# Altium PCB ProtoStack_H750VBT.PcbDoc
Units mm, origin at the board's own origin, x right, y up, seen from the top; angles counter-clockwise.
Board outline 32.13 x 113.14 mm, 5 copper layers (Top Layer, Mid-Layer 1, TopLayer, Internal Plane 1, MidLayer2, Mid-Layer 2, BottomLayer, Bottom Layer), stack 0.498 mm thick; 3 components, 82 nets, 186 pads, 36 vias.
Unrouted connection lines stored in the file: 101.
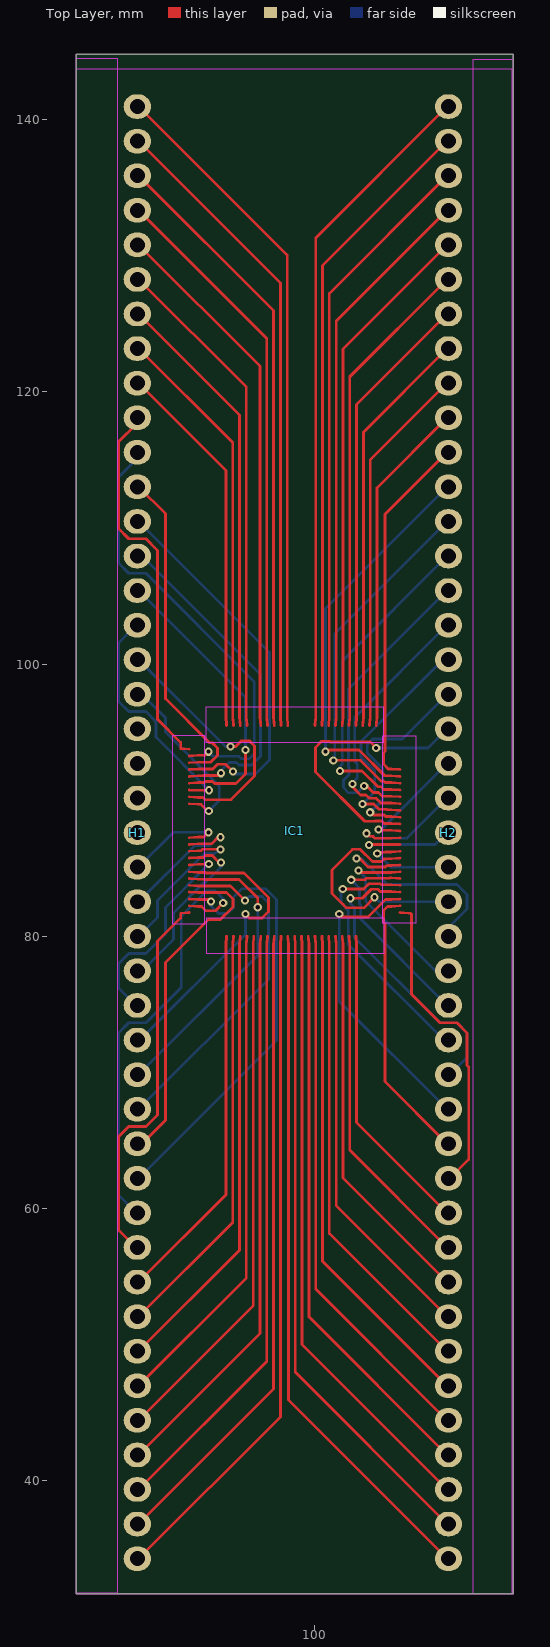
[diagram p0: Top Layer view]
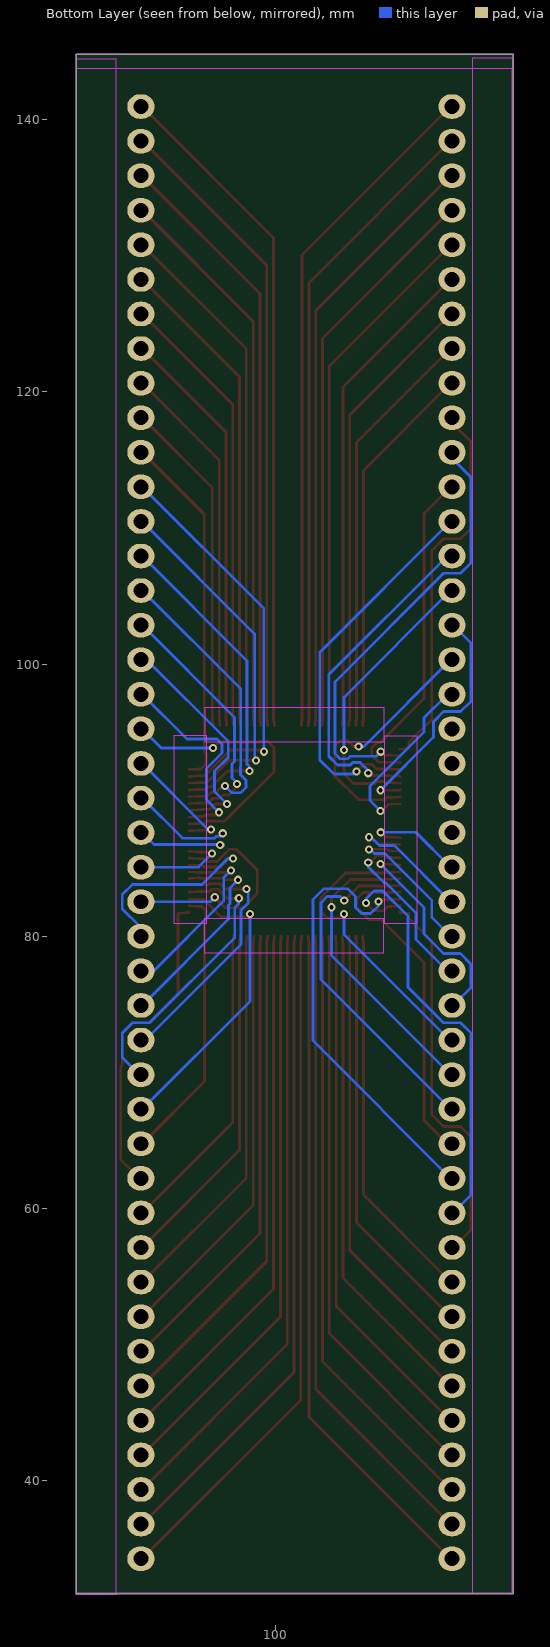
[diagram p1: Bottom Layer view, seen from below]
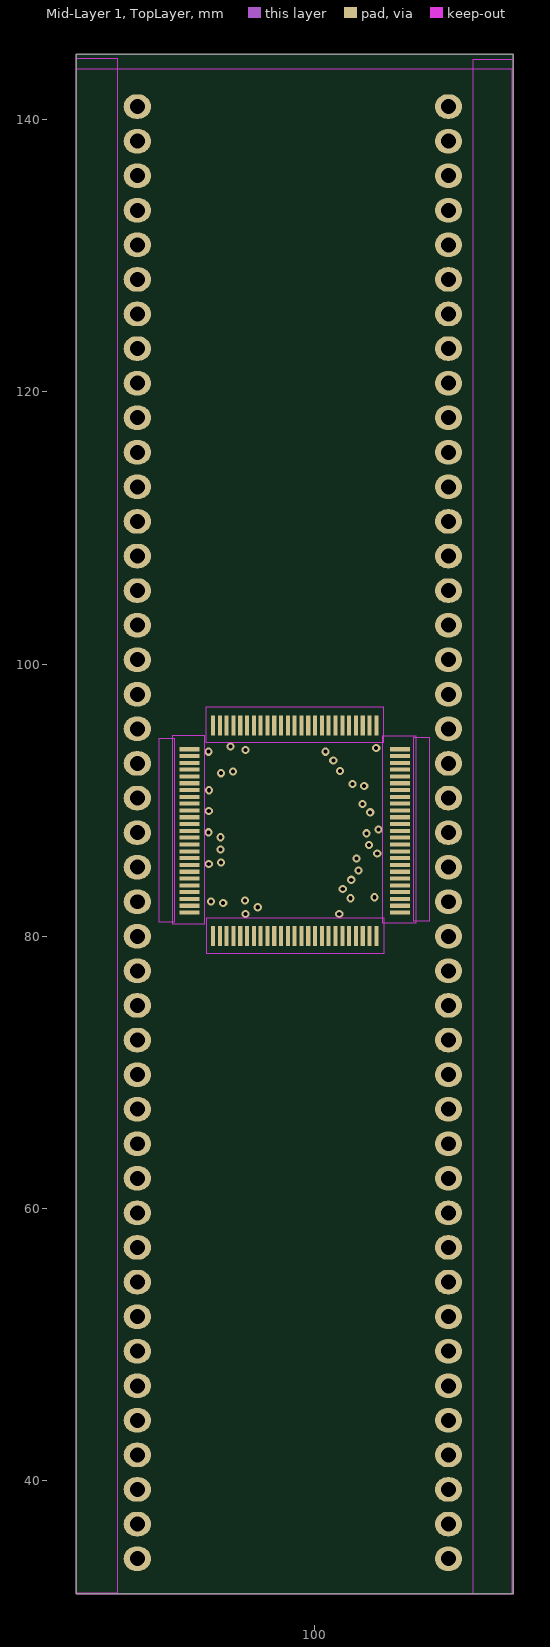
[diagram p2: Mid-Layer 1, TopLayer]
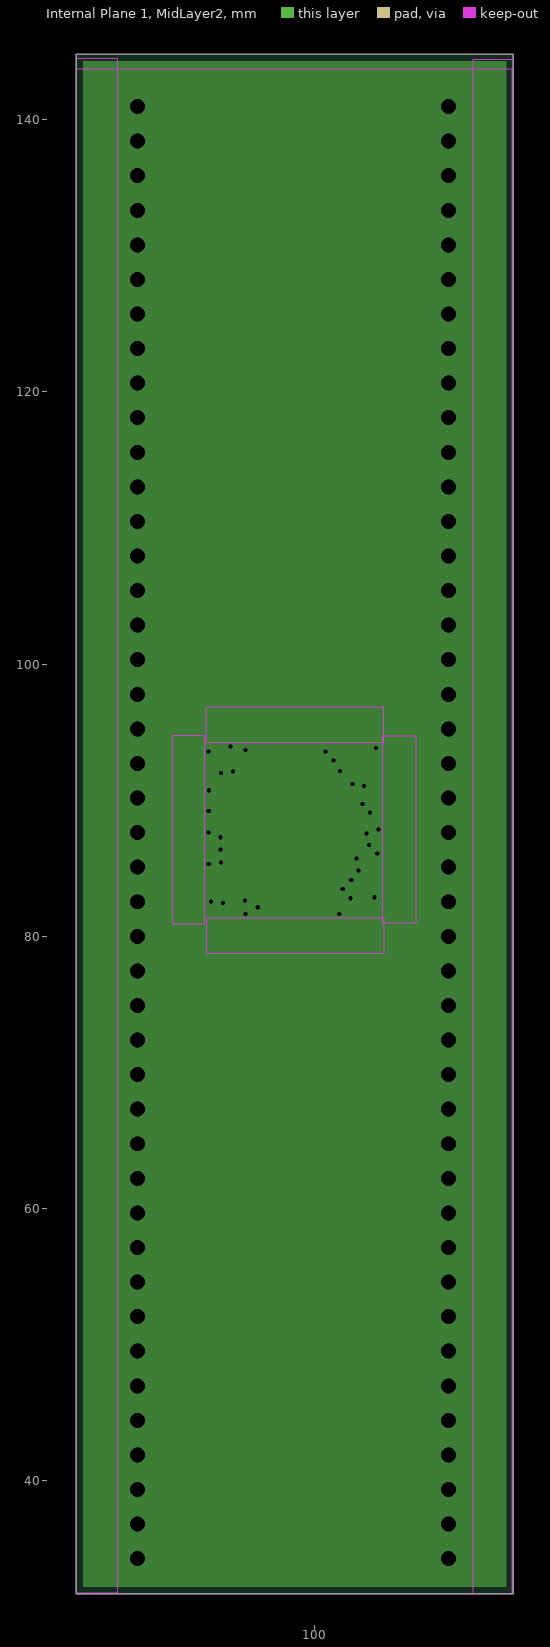
[diagram p3: Internal Plane 1, MidLayer2, clearances drawn from the general rule]

## Layer stack, top to bottom
Top Solder: solder mask 0.0102, Solder Resist, Dk 3.5
Top Layer: signal copper 0.0356
Dielectric 1: dielectric 0.32, FR-4, Dk 4.8
Mid-Layer 1, TopLayer: signal copper 0.0356
Internal Plane 1, MidLayer2: plane copper 0.0356, net Internal Plane 1
Mid-Layer 2, BottomLayer: signal copper 0.0356
Bottom Layer: signal copper 0.0356
Bottom Solder: solder mask 0.0102, Solder Resist, Dk 3.5

## Board outline
82.493,31.693 114.62,31.693 114.62,144.83 82.493,144.83

## Design rules (kind name [scope] priority, off if disabled: settings)
Clearance [All] p1: gap=0.254 ignorepadtopadclearanceinfootprint=FALSE except(0: Arc-Hole Track-Hole SMDPad-Hole THPad-Hole Via-Hole Fill-Hole Poly-Hole Region-Hole Text-Hole)
ComponentClearance ComponentClearance_Design [All] p1: gap=0.25 collisioncheckmode=3 verticalgap=0.25 showdistances=FALSE
ComponentClearance [All] p2: gap=0.254 collisioncheckmode=3 verticalgap=0.254 showdistances=FALSE
PlaneClearance [All] p1: clearance=0
PlaneConnect PadTherm_Pad1 [InPadClass('Pad1')] p1: planeconnectstyle=NoConnect reliefexpansion=0.508 reliefentries=4 reliefconductorwidth=0.254 reliefairgap=0.254
PlaneConnect PadTherm_Pad2 [InPadClass('Pad2')] p2: planeconnectstyle=NoConnect reliefexpansion=0.508 reliefentries=4 reliefconductorwidth=0.254 reliefairgap=0.254
PlaneConnect PadTherm_Pad3 [InPadClass('Pad3')] p3: planeconnectstyle=NoConnect reliefexpansion=0.508 reliefentries=4 reliefconductorwidth=0.254 reliefairgap=0.254
PlaneConnect [All] p4: planeconnectstyle=Relief reliefexpansion=0.508 reliefentries=4 reliefconductorwidth=0.254 reliefairgap=0.254
PolygonConnect [All] p1: connectstyle=Relief reliefconductorwidth=0.254 reliefentries=4 polygonreliefangle="90 Angle" airgapwidth=0.254
RoutingVias [All] p1: holewidth=0.711 width=1.27 viastyle="Through Hole" minholewidth=0.711 minwidth=1.27 maxholewidth=0.711 maxwidth=1.27
SolderMaskExpansion [All] p1: expansion=0.102 istentingtop=FALSE
Width [All] p1: maxlimit=0.254 minlimit=0.254 preferedwidth=0.254
27 further rules are at their usual default settings.

## Classes and differential pairs
pad class Pad3: H1-1 H1-2 H1-3 H1-4 H1-5 H1-6 H1-7 H1-8 H1-9 H1-10 H1-11 H1-12 H1-13 H1-14 H1-15 H1-16 H1-17 H1-18 H1-19 H1-20 H1-21 H1-22 H1-23 H1-24 H1-25 H1-26 H1-27 H1-28 H1-29 H1-30 H1-31 H1-32 H1-33 H1-34 H1-35 H1-36 H1-37 H1-38 H1-39 H1-40 H1-41 H1-42 H1-43 H2-1 H2-2 H2-3 H2-4 H2-5 H2-6 H2-7 H2-8 H2-9 H2-10 H2-11 H2-12 H2-13 H2-14 H2-15 H2-16 H2-17 H2-18 H2-19 H2-20 H2-21 H2-22 H2-23 H2-24 H2-25 H2-26 H2-27 H2-28 H2-29 H2-30 H2-31 H2-32 H2-33 H2-34 H2-35 H2-36 H2-37 H2-38 H2-39 H2-40 H2-41 H2-42 H2-43
pad class Pad2: IC1-26 IC1-27 IC1-28 IC1-29 IC1-30 IC1-31 IC1-32 IC1-33 IC1-34 IC1-35 IC1-36 IC1-37 IC1-38 IC1-39 IC1-40 IC1-41 IC1-42 IC1-43 IC1-44 IC1-45 IC1-46 IC1-47 IC1-48 IC1-49 IC1-50 IC1-76 IC1-77 IC1-78 IC1-79 IC1-80 IC1-81 IC1-82 IC1-83 IC1-84 IC1-85 IC1-86 IC1-87 IC1-88 IC1-89 IC1-90 IC1-91 IC1-92 IC1-93 IC1-94 IC1-95 IC1-96 IC1-97 IC1-98 IC1-99 IC1-100
pad class Pad1: IC1-1 IC1-2 IC1-3 IC1-4 IC1-5 IC1-6 IC1-7 IC1-8 IC1-9 IC1-10 IC1-11 IC1-12 IC1-13 IC1-14 IC1-15 IC1-16 IC1-17 IC1-18 IC1-19 IC1-20 IC1-21 IC1-22 IC1-23 IC1-24 IC1-25 IC1-51 IC1-52 IC1-53 IC1-54 IC1-55 IC1-56 IC1-57 IC1-58 IC1-59 IC1-60 IC1-61 IC1-62 IC1-63 IC1-64 IC1-65 IC1-66 IC1-67 IC1-68 IC1-69 IC1-70 IC1-71 IC1-72 IC1-73 IC1-74 IC1-75

## Components (designator, comment, footprint, x,y, rotation, side; value= is the part's Value field where it differs from the comment)
H1 "" HeaderDtack_43_H1_H1(Primary) 86.995,140.97 r0 top
H2 "" HeaderDtack_43_H2_H2(Primary) 109.855,140.97 r0 top
IC1 "" QFP50P1600X1600X160-100N_ 98.556,87.756 r0 top

## Footprints (in the part's own frame and the unit in brackets; to place one, negate y for a bottom-side part, rotate by r counter-clockwise, add the part's x,y. Pads: shape width x height; smd on the part's side, far side on the other; paste and mask are expansions set on the pad)
HeaderDtack_43_H1_H1(Primary) [mm]
  oval 2x1.8 hole 1.1: 1(0,0) 2(0,-2.54) 3(0,-5.08) 4(0,-7.62) 5(0,-10.16) 6(0,-12.7) 7(0,-15.24) 8(0,-17.78) 9(0,-20.32) 10(0,-22.86) 11(0,-25.4) 12(0,-27.94) 13(0,-30.48) 14(0,-33.02) 15(0,-35.56) 16(0,-38.1) 17(0,-40.64) 18(0,-43.18) 19(0,-45.72) 20(0,-48.26) 21(0,-50.8) 22(0,-53.34) 23(0,-55.88) 24(0,-58.42) 25(0,-60.96) 26(0,-63.5) 27(0,-66.04) 28(0,-68.58) 29(0,-71.12) 30(0,-73.66) 31(0,-76.2) 32(0,-78.74) 33(0,-81.28) 34(0,-83.82) 35(0,-86.36) 36(0,-88.9) 37(0,-91.44) 38(0,-93.98) 39(0,-96.52) 40(0,-99.06) 41(0,-101.6) 42(0,-104.14) 43(0,-106.68)
HeaderDtack_43_H2_H2(Primary) [mm]
  oval 2x1.8 hole 1.1: 1(0,0) 2(0,-2.54) 3(0,-5.08) 4(0,-7.62) 5(0,-10.16) 6(0,-12.7) 7(0,-15.24) 8(0,-17.78) 9(0,-20.32) 10(0,-22.86) 11(0,-25.4) 12(0,-27.94) 13(0,-30.48) 14(0,-33.02) 15(0,-35.56) 16(0,-38.1) 17(0,-40.64) 18(0,-43.18) 19(0,-45.72) 20(0,-48.26) 21(0,-50.8) 22(0,-53.34) 23(0,-55.88) 24(0,-58.42) 25(0,-60.96) 26(0,-63.5) 27(0,-66.04) 28(0,-68.58) 29(0,-71.12) 30(0,-73.66) 31(0,-76.2) 32(0,-78.74) 33(0,-81.28) 34(0,-83.82) 35(0,-86.36) 36(0,-88.9) 37(0,-91.44) 38(0,-93.98) 39(0,-96.52) 40(0,-99.06) 41(0,-101.6) 42(0,-104.14) 43(0,-106.68)
QFP50P1600X1600X160-100N_ [mm]
  round 0 / inner rect 1.475x0.3 / far side round 0 all layers, no hole: 1(-7.738,6) 2(-7.738,5.5) 3(-7.738,5) 4(-7.738,4.5) 5(-7.738,4) 6(-7.738,3.5) 7(-7.738,3) 8(-7.738,2.5) 9(-7.738,2) 10(-7.738,1.5) 11(-7.738,1) 12(-7.738,0.5) 13(-7.738,0) 14(-7.738,-0.5) 15(-7.738,-1) 16(-7.738,-1.5) 17(-7.738,-2) 18(-7.738,-2.5) 19(-7.738,-3) 20(-7.738,-3.5) 21(-7.738,-4) 22(-7.738,-4.5) 23(-7.738,-5) 24(-7.738,-5.5) 25(-7.738,-6) 51(7.738,-6) 52(7.738,-5.5) 53(7.738,-5) 54(7.738,-4.5) 55(7.738,-4) 56(7.738,-3.5) 57(7.738,-3) 58(7.738,-2.5) 59(7.738,-2) 60(7.738,-1.5) 61(7.738,-1) 62(7.738,-0.5) 63(7.738,0) 64(7.738,0.5) 65(7.738,1) 66(7.738,1.5) 67(7.738,2) 68(7.738,2.5) 69(7.738,3) 70(7.738,3.5) 71(7.738,4) 72(7.738,4.5) 73(7.738,5) 74(7.738,5.5) 75(7.738,6)
  round 0 / inner rect 0.3x1.475 / far side round 0 all layers, no hole: 26(-6,-7.738) 27(-5.5,-7.738) 28(-5,-7.738) 29(-4.5,-7.738) 30(-4,-7.738) 31(-3.5,-7.738) 32(-3,-7.738) 33(-2.5,-7.738) 34(-2,-7.738) 35(-1.5,-7.738) 36(-1,-7.738) 37(-0.5,-7.738) 38(0,-7.738) 39(0.5,-7.738) 40(1,-7.738) 41(1.5,-7.738) 42(2,-7.738) 43(2.5,-7.738) 44(3,-7.738) 45(3.5,-7.738) 46(4,-7.738) 47(4.5,-7.738) 48(5,-7.738) 49(5.5,-7.738) 50(6,-7.738) 76(6,7.738) 77(5.5,7.738) 78(5,7.738) 79(4.5,7.738) 80(4,7.738) 81(3.5,7.738) 82(3,7.738) 83(2.5,7.738) 84(2,7.738) 85(1.5,7.738) 86(1,7.738) 87(0.5,7.738) 88(0,7.738) 89(-0.5,7.738) 90(-1,7.738) 91(-1.5,7.738) 92(-2,7.738) 93(-2.5,7.738) 94(-3,7.738) 95(-3.5,7.738) 96(-4,7.738) 97(-4.5,7.738) 98(-5,7.738) 99(-5.5,7.738) 100(-6,7.738)

## Via types
v1: diameter 0.6, hole 0.3, Top Layer to Bottom Layer, 36 vias

## Nets (pads, with @x,y where several pads share a name; then routed paths per layer and width w, separated by ;. In a path a pad name is that pad's centre, name@x,y a point inside that pad or via, vN(x,y) a via of type N, cw(c..) or ccw(c..) an arc to the next point about the centre after c; other vN are vias at no path point)
NetH1_1: H1.1 IC1.89 | length 50.1
  Top Layer w0.203: H1.1 87.095,140.97 98.008,130.057 98.008,96.232 98.008,96.13 IC1.89
NetH1_2: H1.2 IC1.90 | length 47.4
  Top Layer w0.203: H1.2 87.095,138.43 97.508,128.017 97.508,96.232 97.508,96.13 IC1.90
NetH1_3: H1.3 IC1.91 | length 44.6
  Top Layer w0.203: H1.3 87.095,135.89 97.008,125.977 97.008,96.232 97.008,96.13 IC1.91
NetH1_4: H1.4 IC1.92 | length 41.9
  Top Layer w0.203: H1.4 87.095,133.35 96.508,123.937 96.508,96.232 96.508,96.13 IC1.92
NetH1_5: H1.5 IC1.93 | length 39.1
  Top Layer w0.203: H1.5 87.095,130.81 96.008,121.897 96.008,96.232 96.008,96.13 IC1.93
NetH1_6: H1.6 IC1.95 | length 36.2
  Top Layer w0.203: H1.6 87.095,128.27 95.008,120.357 95.008,96.232 95.008,96.13 IC1.95
NetH1_7: H1.7 IC1.96 | length 33.4
  Top Layer w0.203: H1.7 87.095,125.73 94.508,118.317 94.508,96.232 94.508,96.13 IC1.96
NetH1_8: H1.8 IC1.97 | length 30.7
  Top Layer w0.203: H1.8 87.095,123.19 94.008,116.277 94.008,96.232 94.008,96.13 IC1.97
NetH1_9: H1.9 IC1.98 | length 27.9
  Top Layer w0.203: H1.9 87.095,120.65 93.508,114.237 93.508,96.232 93.508,96.13 IC1.98
NetH1_10: H1.10 IC1.1 | length 28.2
  Top Layer w0.203: 85.613,111.803 85.613,113.739 ; 85.613,114.343 85.613,116.343 86.895,117.625 86.895,118.11 H1.10 ; 85.613,111.802 85.613,109.976 86.369,109.22 87.621,109.22 88.478,108.363 88.478,95.957 90.182,94.253 90.182,93.906 90.182,93.805 IC1.1 ; 85.613,113.74 85.613,114.342
NetH1_11: H1.11 IC1.2 | length 32.9
  Top Layer w0.203: IC1.2 91.454,93.305 91.556,93.305 91.963,93.305 v1(92.234,93.575)
  Bottom Layer w0.203: 85.613,109.939 85.613,111.136 ; 85.613,111.803 85.613,113.739 86.895,115.021 86.895,115.57 H1.11 ; 85.613,109.938 85.613,107.436 86.369,106.68 87.621,106.68 95.594,98.707 95.594,93.433 95.209,93.048 94.664,93.048 94.477,93.235 92.574,93.235 v1(92.234,93.575) ; 85.613,111.136 85.613,111.802
NetH1_12: H1.12 IC1.3 | length 24.6
  Top Layer w0.203: H1.12 87.095,113.03 89.062,111.063 89.062,97.468 92.298,94.231 92.505,94.231 92.889,93.847 92.889,93.304 92.39,92.805 91.556,92.805 91.454,92.805 IC1.3
NetH1_13: H1.13 IC1.4 | length 28.4
  Top Layer w0.203: IC1.4 91.454,92.305 91.556,92.305 92.537,92.305 92.881,92.649 93.484,92.649 v1(94.015,92.118)
  Bottom Layer w0.203: H1.13 87.095,110.49 96.711,100.874 96.711,92.97 95.672,91.931 94.202,91.931 v1(94.015,92.118)
NetH1_14: H1.14 IC1.5 | length 24.8
  Top Layer w0.203: IC1.5 91.454,91.805 91.556,91.805 91.801,91.805 91.816,91.82 92.979,91.82 v1(93.153,91.993)
  Bottom Layer w0.203: H1.14 87.095,107.95 87.337,107.95 96.053,99.233 96.053,93.243 95.399,92.589 94.474,92.589 94.287,92.776 93.743,92.776 93.153,92.186 v1(93.153,91.993)
NetH1_15: H1.15 IC1.6 | length 21.3
  Top Layer w0.203: IC1.6 91.454,91.305 91.556,91.305 91.926,91.305 91.999,91.377 92.524,91.377 92.665,91.236 94.239,91.236 94.937,91.933 v1(94.937,93.705)
  Bottom Layer w0.203: H1.15 87.095,105.41 94.937,97.568 v1(94.937,93.705)
NetH1_16: H1.16 IC1.7 | length 17.7
  Top Layer w0.203: IC1.7 91.454,90.743 91.556,90.743 v1(92.262,90.743)
  Bottom Layer w0.203: 85.613,99.525 85.613,101.557 86.895,102.84 86.895,102.87 H1.16 ; 85.613,99.524 85.613,97.276 86.369,96.52 87.621,96.52 88.365,95.776 88.365,94.639 v1(92.262,90.743)
NetH1_17: H1.17 IC1.8 | length 19.4
  Top Layer w0.203: IC1.8 91.454,90.208 91.556,90.208 91.805,90.208 91.966,90.047 93.877,90.047 95.613,91.783 95.613,93.985 95.217,94.381 94.657,94.381 94.229,93.953 v1(93.854,93.953)
  Bottom Layer w0.203: H1.17 87.095,100.33 93.472,93.953 v1(93.854,93.953)
NetH1_18: H1.18 IC1.9 | length 13.2
  Top Layer w0.203: IC1.9 91.454,89.708 91.556,89.708 91.681,89.708 92.164,89.225 v1(92.244,89.225)
  Bottom Layer w0.203: H1.18 87.095,97.79 87.337,97.79 89.062,96.065 89.062,95.013 93.019,91.056 93.019,89.999 v1(92.244,89.225)
NetH1_23: H1.23 IC1.14 | length 7.9
  Top Layer w0.203: IC1.14 91.454,87.305 91.556,87.305 91.885,87.305 v1(92.233,87.652)
  Bottom Layer w0.203: H1.23 87.095,85.09 89.657,87.652 v1(92.233,87.652)
NetH1_24: H1.24 IC1.15 | length 10.5
  Top Layer w0.203: IC1.15 91.454,86.805 91.556,86.805 92.454,86.805 92.934,87.285 v1(93.097,87.285)
  Bottom Layer w0.203: H1.24 87.095,82.55 91.224,86.679 92.328,86.679 92.934,87.285 v1(93.097,87.285)
NetH1_25: H1.25 IC1.16 | length 11.8
  Top Layer w0.203: IC1.16 91.454,86.305 91.556,86.305 91.681,86.305 91.789,86.413 93.073,86.413 v1(93.102,86.385)
  Bottom Layer w0.203: H1.25 87.095,80.01 88.478,81.393 88.478,82.651 91.921,86.095 92.704,86.095 92.994,86.385 v1(93.102,86.385)
NetH1_26: H1.26 IC1.17 | length 13.4
  Top Layer w0.203: IC1.17 91.454,85.805 91.556,85.805 91.852,85.805 91.986,85.938 92.505,85.938 93.012,85.431 v1(93.147,85.431)
  Bottom Layer w0.203: H1.26 87.095,77.47 87.337,77.47 89.646,79.78 89.646,81.735 91.841,83.93 91.97,83.93 93.147,85.107 v1(93.147,85.431)
NetH1_27: H1.27 IC1.18 | length 15.9
  Top Layer w0.203: IC1.18 91.454,85.305 91.556,85.305 92.238,85.305 v1(92.245,85.312)
  Bottom Layer w0.203: H1.27 86.895,74.93 85.625,76.2 85.625,77.996 86.369,78.74 87.621,78.74 89.062,80.181 89.062,82.128 v1(92.245,85.312)
NetH1_28: H1.28 IC1.19 | length 22.3
  Top Layer w0.203: IC1.19 91.454,84.708 91.556,84.708 92.012,84.708 92.057,84.663 92.201,84.663 92.212,84.652 94.832,84.652 96.629,82.856 96.629,81.822 96.17,81.363 95.224,81.363 v1(94.937,81.651)
  Bottom Layer w0.203: H1.28 87.095,72.39 87.177,72.39 94.937,80.149 v1(94.937,81.651)
NetH1_29: H1.29 IC1.20 | length 22.3
  Top Layer w0.203: IC1.20 91.454,84.208 91.556,84.208 91.888,84.208 91.905,84.19 94.468,84.19 95.846,82.812 v1(95.846,82.146)
  Bottom Layer w0.203: H1.29 87.095,69.85 95.846,78.601 v1(95.846,82.146)
NetH1_30: H1.30 IC1.21 | length 25.8
  Top Layer w0.203: IC1.21 91.454,83.708 91.556,83.708 93.844,83.708 v1(94.91,82.641)
  Bottom Layer w0.203: H1.30 87.095,67.31 96.629,76.844 96.629,82.47 96.17,82.929 95.198,82.929 v1(94.91,82.641)
NetH1_31: H1.31 IC1.22 | length 25
  Top Layer w0.203: H1.31 87.095,64.77 87.337,64.77 89.062,66.495 89.062,78.074 92.226,81.238 93.09,81.238 94.017,82.165 94.017,82.756 93.541,83.232 91.556,83.232 91.454,83.232 IC1.22
NetH1_32: H1.32 IC1.23 | length 33.3
  Top Layer w0.203: IC1.23 91.454,82.708 91.556,82.708 92.263,82.708 v1(92.407,82.563)
  Bottom Layer w0.203: H1.32 87.095,62.23 97.213,72.348 97.213,82.712 96.412,83.513 94.675,83.513 94.087,82.925 94.087,82.137 93.629,81.678 92.98,81.678 92.407,82.251 v1(92.407,82.563)
NetH1_33: H1.33 IC1.24 | length 32.3
  Top Layer w0.203: IC1.24 91.454,82.208 91.556,82.208 91.723,82.208 92.051,81.88 92.724,81.88 v1(93.304,82.461)
  Bottom Layer w0.203: 85.613,62.969 85.613,61.003 86.895,59.72 86.895,59.69 H1.33 ; 85.613,63.543 85.613,65.573 ; 85.613,66.083 85.613,68.176 ; 85.613,68.623 85.613,70.78 ; 85.613,62.969 85.613,63.542 ; 85.613,65.573 85.613,66.082 ; 85.613,68.177 85.613,68.622 ; 85.613,70.78 85.613,72.904 86.369,73.66 87.621,73.66 90.23,76.269 90.23,81.493 92.083,83.346 92.732,83.346 93.304,82.773 v1(93.304,82.461)
NetH1_34: H1.34 IC1.25 | length 28.5
  Top Layer w0.203: 85.613,60.365 85.613,58.432 86.895,57.15 H1.34 ; 85.613,61.003 85.613,62.969 ; 85.613,60.366 85.613,61.002 ; 85.613,62.969 85.613,65.284 86.369,66.04 87.621,66.04 88.478,66.897 88.478,79.659 90.182,81.364 90.182,81.606 90.182,81.708 IC1.25
NetH1_35: H1.35 IC1.28 | length 28.2
  Top Layer w0.203: H1.35 87.095,54.61 93.508,61.023 93.508,79.281 93.508,79.382 IC1.28
NetH1_36: H1.36 IC1.29 | length 30.9
  Top Layer w0.203: H1.36 87.095,52.07 94.008,58.983 94.008,79.281 94.008,79.382 IC1.29
NetH1_37: H1.37 IC1.30 | length 33.7
  Top Layer w0.203: H1.37 87.095,49.53 94.508,56.943 94.508,79.281 94.508,79.382 IC1.30
NetH1_38: H1.38 IC1.31 | length 36.4
  Top Layer w0.203: H1.38 87.095,46.99 95.008,54.903 95.008,79.281 95.008,79.382 IC1.31
NetH1_39: H1.39 IC1.32 | length 39.2
  Top Layer w0.203: H1.39 87.095,44.45 95.508,52.863 95.508,79.281 95.508,79.382 IC1.32
NetH1_40: H1.40 IC1.33 | length 41.9
  Top Layer w0.203: H1.40 87.095,41.91 96.008,50.823 96.008,79.281 96.008,79.382 IC1.33
NetH1_41: H1.41 IC1.34 | length 44.6
  Top Layer w0.203: H1.41 87.095,39.37 96.508,48.783 96.508,79.281 96.508,79.382 IC1.34
NetH1_42: H1.42 IC1.35 | length 47.4
  Top Layer w0.203: H1.42 87.095,36.83 97.008,46.743 97.008,79.281 97.008,79.382 IC1.35
NetH1_43: H1.43 IC1.36 | length 50.1
  Top Layer w0.203: H1.43 87.095,34.29 97.508,44.703 97.508,79.281 97.508,79.382 IC1.36
NetH2_1: H2.1 IC1.85 | length 49.6
  Top Layer w0.203: IC1.85 100.105,96.13 100.105,96.232 100.105,131.32 109.755,140.97 H2.1
NetH2_2: H2.2 IC1.84 | length 46.8
  Top Layer w0.203: IC1.84 100.605,96.13 100.605,96.232 100.605,129.28 109.755,138.43 H2.2
NetH2_3: H2.3 IC1.83 | length 44.1
  Top Layer w0.203: IC1.83 101.105,96.13 101.105,96.232 101.105,127.24 109.755,135.89 H2.3
NetH2_4: H2.4 IC1.82 | length 41.3
  Top Layer w0.203: IC1.82 101.605,96.13 101.605,96.232 101.605,125.2 109.755,133.35 H2.4
NetH2_5: H2.5 IC1.81 | length 38.6
  Top Layer w0.203: IC1.81 102.105,96.13 102.105,96.232 102.105,123.16 109.755,130.81 H2.5
NetH2_6: H2.6 IC1.80 | length 35.8
  Top Layer w0.203: IC1.80 102.605,96.13 102.605,96.232 102.605,121.12 109.755,128.27 H2.6
NetH2_7: H2.7 IC1.79 | length 33.1
  Top Layer w0.203: IC1.79 103.105,96.13 103.105,96.232 103.105,119.08 109.755,125.73 H2.7
NetH2_8: H2.8 IC1.78 | length 30.3
  Top Layer w0.203: IC1.78 103.605,96.13 103.605,96.232 103.605,117.04 109.755,123.19 H2.8
NetH2_9: H2.9 IC1.77 | length 27.6
  Top Layer w0.203: IC1.77 104.105,96.13 104.105,96.232 104.105,115 109.755,120.65 H2.9
NetH2_10: H2.10 IC1.76 | length 24.9
  Top Layer w0.203: IC1.76 104.605,96.13 104.605,96.232 104.605,112.96 109.755,118.11 H2.10
NetH2_11: H2.11 IC1.72 | length 26.3
  Top Layer w0.203: IC1.72 105.659,92.305 105.557,92.305 105.432,92.305 105.074,92.662 105.074,93.452 105.201,93.579 105.201,111.016 109.755,115.57 H2.11
NetH2_12: H2.12 IC1.71 | length 29.6
  Top Layer w0.203: v1(100.819,93.575) 100.944,93.699 103.286,93.699 105.176,91.809 105.22,91.809 105.225,91.805 105.557,91.805 105.659,91.805 IC1.71
  Bottom Layer w0.203: v1(100.819,93.575) 100.819,104.094 109.755,113.03 H2.12
NetH2_13: H2.13 IC1.70 | length 26.7
  Top Layer w0.203: v1(101.397,92.922) 101.413,92.938 103.387,92.938 104.895,91.43 105.063,91.43 105.188,91.305 105.557,91.305 105.659,91.305 IC1.70
  Bottom Layer w0.203: v1(101.397,92.922) 101.493,93.018 101.493,102.228 109.755,110.49 H2.13
NetH2_14: H2.14 IC1.69 | length 24.1
  Top Layer w0.203: v1(101.886,92.155) 103.51,92.155 104.659,91.005 104.887,91.005 105.087,90.805 105.557,90.805 105.659,90.805 IC1.69
  Bottom Layer w0.203: v1(101.886,92.155) 101.886,92.481 102.054,92.649 102.054,100.249 109.755,107.95 H2.14
NetH2_15: H2.15 IC1.68 | length 22.6
  Top Layer w0.203: v1(103.663,91.06) 103.853,91.06 104.333,90.58 104.711,90.58 104.986,90.305 105.557,90.305 105.659,90.305 IC1.68
  Bottom Layer w0.203: v1(103.663,91.06) 103.153,90.55 102.523,90.55 102.139,90.935 102.139,91.479 102.543,91.883 102.543,92.427 102.513,92.457 102.513,98.168 109.755,105.41 H2.15
NetH2_16: H2.16 IC1.67 | length 19
  Top Layer w0.203: v1(102.795,91.207) 102.795,90.995 103.39,90.401 103.807,90.401 104.053,90.155 104.535,90.155 104.885,89.805 105.557,89.805 105.659,89.805 IC1.67
  Bottom Layer w0.203: v1(102.795,91.207) 102.795,91.266 103.158,91.628 103.158,92.682 102.971,92.868 102.971,96.086 109.755,102.87 H2.16
NetH2_17: H2.17 IC1.66 | length 17.2
  Top Layer w0.203: v1(103.534,89.741) 103.545,89.73 104.359,89.73 104.745,89.343 105.315,89.343 105.353,89.305 105.557,89.305 105.659,89.305 IC1.66
  Bottom Layer w0.203: v1(103.534,89.741) 104.446,90.653 104.446,92.152 103.43,93.168 103.43,94.313 109.447,100.33 109.755,100.33 H2.17
NetH2_18: H2.18 IC1.65 | length 15.7
  Top Layer w0.203: v1(104.106,89.12) 104.312,88.914 105.137,88.914 105.246,88.805 105.557,88.805 105.659,88.805 IC1.65
  Bottom Layer w0.203: v1(104.106,89.12) 105.03,90.044 105.03,92.327 103.889,93.468 103.889,94.123 104.274,94.508 106.473,94.508 109.755,97.79 H2.18
NetH2_19: H2.19 IC1.64 | length 20.3
  Top Layer w0.203: v1(104.546,93.851) 104.118,94.279 101.163,94.279 101.126,94.316 100.512,94.316 100.078,93.882 100.078,92.09 103.702,88.467 104.431,88.467 104.449,88.485 104.959,88.485 105.139,88.305 105.557,88.305 105.659,88.305 IC1.64
  Bottom Layer w0.203: v1(104.546,93.851) 108.356,93.851 109.755,95.25 H2.19
NetH2_20: H2.20 IC1.63 | length 8.8
  Top Layer w0.203: v1(104.704,87.869) 104.769,87.805 105.557,87.805 105.659,87.805 IC1.63
  Bottom Layer w0.203: v1(104.704,87.869) 104.914,87.869 109.755,92.71 H2.20
NetH2_21: H2.21 IC1.62 | length 10
  Top Layer w0.203: v1(103.838,87.579) 104.057,87.359 104.296,87.359 104.435,87.22 105.557,87.22 105.659,87.22 IC1.62
  Bottom Layer w0.203: v1(103.838,87.579) 104.057,87.359 104.296,87.359 104.435,87.22 106.805,87.22 109.755,90.17 H2.21
NetH2_22: H2.22 IC1.61 | length 8.5
  Top Layer w0.203: v1(104.028,86.71) 104.07,86.753 105.557,86.753 105.659,86.753 IC1.61
  Bottom Layer w0.203: v1(104.028,86.71) 104.07,86.753 108.878,86.753 109.755,87.63 H2.22
NetH2_23: H2.23 IC1.60 | length 7.4
  Top Layer w0.203: v1(104.623,86.096) 104.714,86.187 105.018,86.187 105.024,86.193 105.027,86.19 105.22,86.19 105.229,86.199 105.232,86.195 105.419,86.195 105.432,86.208 105.557,86.208 105.659,86.208 IC1.60
  Bottom Layer w0.203: v1(104.623,86.096) 105.629,85.09 109.755,85.09 H2.23
NetH2_24: H2.24 IC1.59 | length 17.2
  Top Layer w0.203: v1(104.429,82.88) 103.652,82.104 102.369,82.104 102.12,82.353 102.107,82.353 101.307,83.154 101.307,84.892 102.814,86.399 103.377,86.399 104.266,85.51 104.932,85.51 105.109,85.687 105.204,85.687 105.225,85.708 105.557,85.708 105.659,85.708 IC1.59
  Bottom Layer w0.203: v1(104.429,82.88) 104.759,82.55 109.755,82.55 H2.24
NetH2_25: H2.25 IC1.58 | length 16.4
  Top Layer w0.203: v1(103.096,85.719) 103.339,85.719 103.957,85.101 105.219,85.101 105.313,85.195 105.419,85.195 105.432,85.208 105.557,85.208 105.659,85.208 IC1.58
  Bottom Layer w0.203: v1(103.096,85.719) 103.475,85.719 105.374,83.82 110.481,83.82 111.225,83.076 111.225,82.024 109.955,80.754 109.955,80.01 H2.25
NetH2_26: H2.26 IC1.57 | length 13.8
  Top Layer w0.203: v1(103.242,84.845) 103.395,84.693 105.542,84.693 105.557,84.708 105.659,84.708 IC1.57
  Bottom Layer w0.203: v1(103.242,84.845) 103.773,84.315 103.773,82.609 108.911,77.47 109.755,77.47 H2.26
NetH2_27: H2.27 IC1.56 | length 15.9
  Top Layer w0.203: v1(102.713,84.163) 103.726,84.163 103.847,84.284 105.536,84.284 105.557,84.305 105.659,84.305 IC1.56
  Bottom Layer w0.203: v1(102.713,84.163) 103.316,83.56 103.316,82.406 103.414,82.308 103.414,81.271 109.755,74.93 H2.27
NetH2_28: H2.28 IC1.55 | length 19
  Top Layer w0.203: v1(102.089,83.478) 102.095,83.484 103.625,83.484 104.017,83.875 104.841,83.875 104.911,83.805 105.557,83.805 105.659,83.805 IC1.55
  Bottom Layer w0.203: v1(102.089,83.478) 101.959,83.347 101.959,82.456 102.49,81.925 102.49,79.413 109.513,72.39 109.755,72.39 H2.28
NetH2_29: H2.29 IC1.54 | length 21.8
  Top Layer w0.203: v1(102.66,82.805) 103.525,82.805 104.186,83.466 104.671,83.466 104.833,83.305 105.557,83.305 105.659,83.305 IC1.54
  Bottom Layer w0.203: v1(102.66,82.805) 102.66,82.408 102.952,82.116 102.952,79.937 109.229,73.66 110.481,73.66 111.225,72.916 111.225,71.12 109.955,69.85 H2.29
NetH2_30: H2.30 IC1.53 | length 22.8
  Top Layer w0.203: v1(101.83,81.651) 102.043,81.438 103.955,81.438 105.225,82.708 105.557,82.708 105.659,82.708 IC1.53
  Bottom Layer w0.203: v1(101.83,81.651) 101.83,75.235 109.755,67.31 H2.30
NetH2_31: H2.31 IC1.52 | length 20.5
  Top Layer w0.203: IC1.52 105.659,82.208 105.557,82.208 105.374,82.208 105.074,81.908 105.074,81.07 105.189,80.956 105.189,69.336 109.755,64.77 H2.31
NetH2_32: H2.32 IC1.51 | length 23.4
  Top Layer w0.203: IC1.51 106.93,81.708 107.032,81.708 107.074,81.708 107.133,81.648 107.133,75.755 109.229,73.66 110.481,73.66 111.225,72.916 111.225,70.535 111.338,70.423 111.338,63.613 109.955,62.23 H2.32
NetH2_33: H2.33 IC1.47 | length 23.2
  Top Layer w0.203: IC1.47 103.105,79.382 103.105,79.281 103.105,66.34 109.755,59.69 H2.33
NetH2_34: H2.34 IC1.46 | length 25.9
  Top Layer w0.203: IC1.46 102.605,79.382 102.605,79.281 102.605,64.3 109.755,57.15 H2.34
NetH2_35: H2.35 IC1.45 | length 28.7
  Top Layer w0.203: IC1.45 102.105,79.382 102.105,79.281 102.105,62.26 109.755,54.61 H2.35
NetH2_36: H2.36 IC1.44 | length 31.4
  Top Layer w0.203: IC1.44 101.605,79.382 101.605,79.281 101.605,60.22 109.755,52.07 H2.36
NetH2_37: H2.37 IC1.43 | length 34.2
  Top Layer w0.203: IC1.43 101.105,79.382 101.105,79.281 101.105,58.18 109.755,49.53 H2.37
NetH2_38: H2.38 IC1.42 | length 36.9
  Top Layer w0.203: IC1.42 100.605,79.382 100.605,79.281 100.605,56.14 109.755,46.99 H2.38
NetH2_39: H2.39 IC1.41 | length 39.7
  Top Layer w0.203: IC1.41 100.105,79.382 100.105,79.281 100.105,54.1 109.755,44.45 H2.39
NetH2_40: H2.40 IC1.40 | length 42.4
  Top Layer w0.203: IC1.40 99.605,79.382 99.605,79.281 99.605,52.06 109.755,41.91 H2.40
NetH2_41: H2.41 IC1.39 | length 45.2
  Top Layer w0.203: IC1.39 99.105,79.382 99.105,79.281 99.105,50.02 109.755,39.37 H2.41
NetH2_42: H2.42 IC1.38 | length 47.9
  Top Layer w0.203: IC1.38 98.605,79.382 98.605,79.281 98.605,47.98 109.755,36.83 H2.42
NetH2_43: H2.43 IC1.37 | length 50.7
  Top Layer w0.203: IC1.37 98.105,79.382 98.105,79.281 98.105,45.94 109.755,34.29 H2.43
pads on no net: H1.19 H1.20 H1.21 H1.22 IC1.10 IC1.11 IC1.12 IC1.13 IC1.26 IC1.27 IC1.48 IC1.49 IC1.50 IC1.73 IC1.74 IC1.75 IC1.86 IC1.87 IC1.88 IC1.94 IC1.99 IC1.100

## Polygon pours and split planes (outlines as drawn)
no net on Internal Plane 1, MidLayer2 (split plane): 114.109,32.203 83.003,32.203 83.003,144.32 114.109,144.32

## Keep-outs
Mid-Layer 1, TopLayer:
  region: 108.432,94.631 108.432,81.122 107.3,81.122 107.3,94.631
  region: 89.728,94.563 89.728,81.054 88.597,81.054 88.597,94.563
Keep-Out Layer, board:
  lines w0: 82.493,31.693 82.493,144.83 114.62,144.83 114.62,31.693 82.493,31.693 ; 82.556,31.756 114.556,31.756 114.556,143.756 82.556,143.756 82.556,31.756
Multi-Layer:
  region: 92.007,96.835 92.007,94.253 105.111,94.253 105.111,96.835
  region: 92.052,81.351 92.052,78.769 105.155,78.769 105.155,81.351
  region: 107.454,94.738 107.454,80.978 105.021,80.978 105.021,94.738
  region: 89.575,94.738 89.575,80.919 91.933,80.919 91.933,94.738
  region: 114.629,144.433 114.629,31.664 111.663,31.664 111.663,144.433
  region: 85.511,144.518 85.511,31.749 82.545,31.749 82.545,144.518